# EAGLE board io_breakout-ver2.1 (EAGLE 9.4.2)
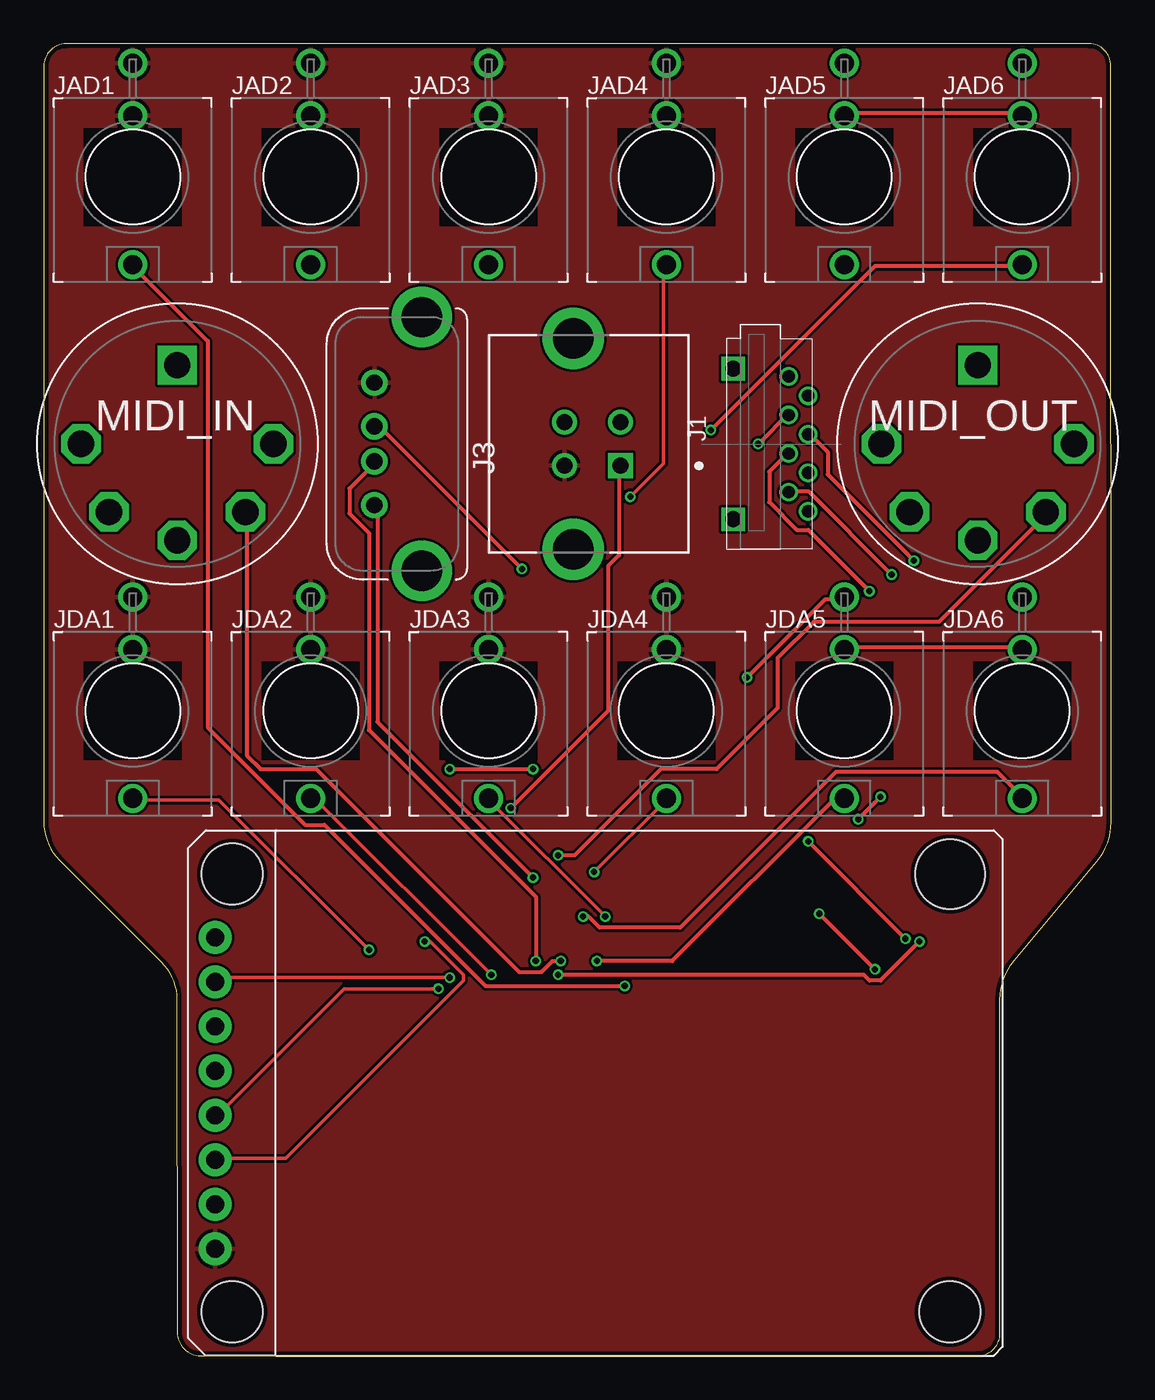
[diagram p0: board, top side]
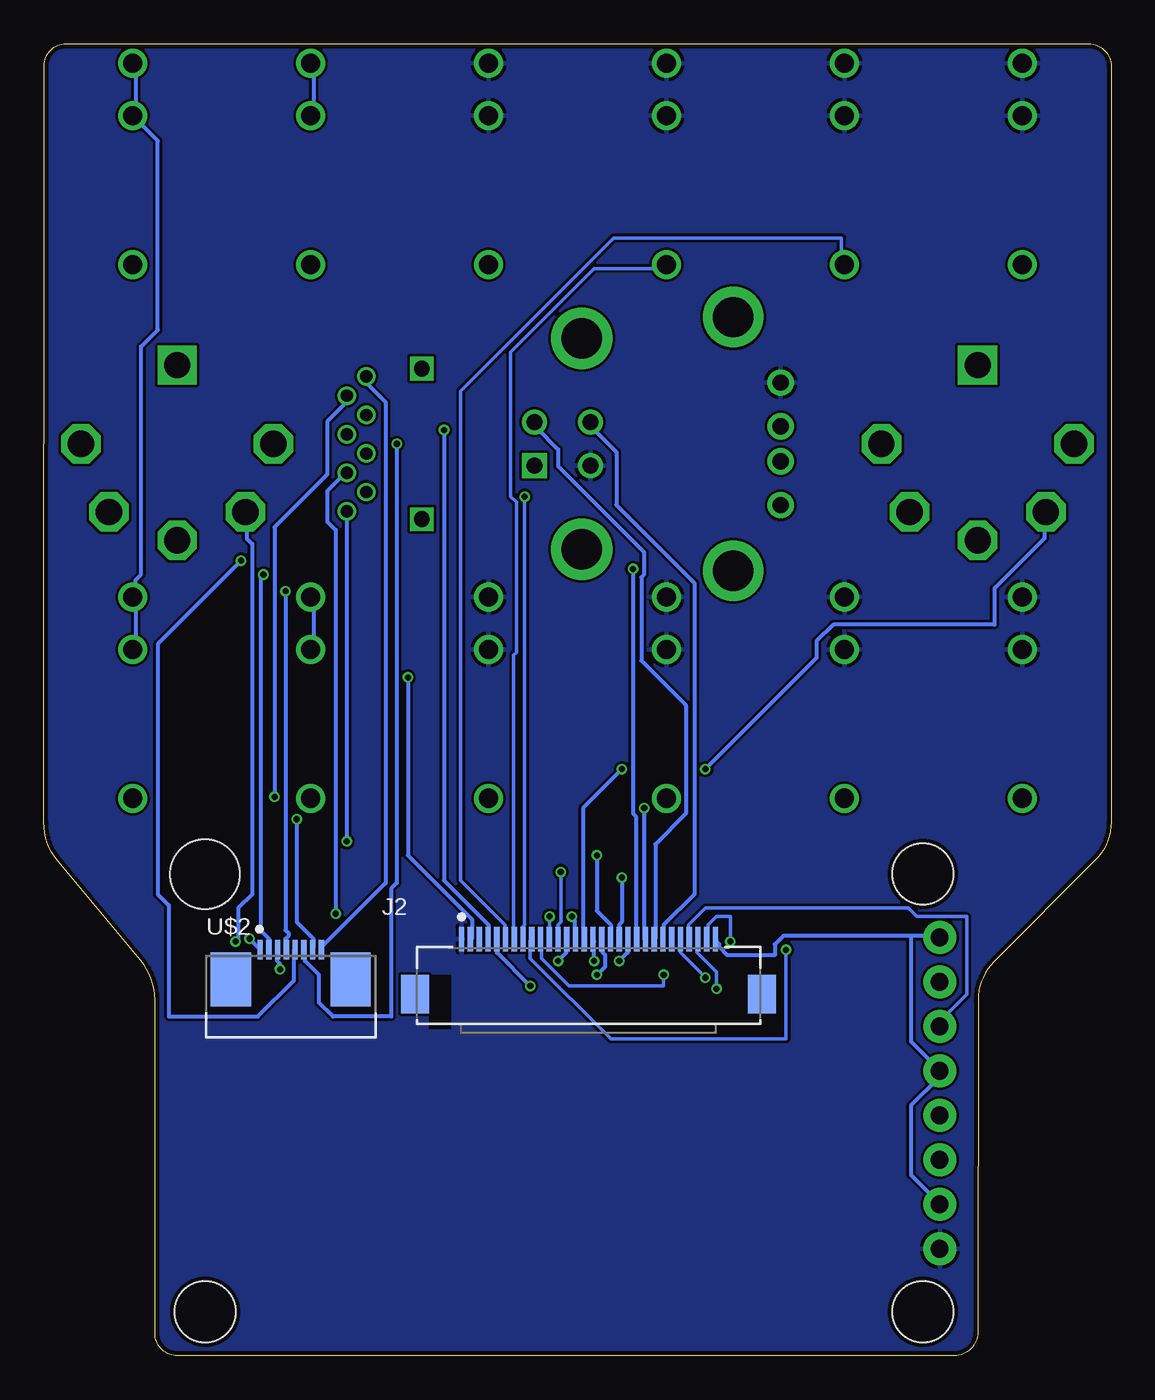
[diagram p1: board, bottom side, seen from below]

Size 60.96 x 74.92 mm. Coordinates in mm from the lower left corner, seen from the top.
Outline: 7.59,20.32 7.62,1.34 arc90 8.96,0 53.34,0 arc90 54.61,1.27 54.61,20.32 arc-40 55.42,22.57 60.15,28.23 arc40 60.96,30.48 60.94,73.67 arc90 59.69,74.92 1.27,74.92 arc90 0,73.65 0,30.48 arc45 0.9,28.31 6.7,22.49 arc-45 7.59,20.32
Copper layers (1*16): Top 0.018mm / dielectric 1.55mm / Bottom 0.018mm
Design rules "eC_2Layer_PClass6_BaseCopperO18_eCDefault": minimum track width 0.15mm, minimum drill 0.35mm, track to track 0.15mm, track to pad 0.15mm, pad to pad 0.15mm, via to via 0.15mm, smd to smd 0mil, copper to edge 0.25mm, drill to drill 0.35mm, minimum pad ring 0.175mm, minimum via ring 0.125mm, stop-mask expansion 0mil, vias tented up to drill 0.45mm, thermal gap 0.2mm
Net classes: 0 POWERxx: width 0.229 mm; 1 defaultxx: width 0.203 mm, drill 0.127 mm, clearance 0.127 mm

## Footprints (pad centres in the part's own frame; a part is rotated, then mirrored left to right if it is on the bottom)
WURTH_ELECTRONICS_61400413321_0 = drill 0.92 pad 1.42 square: 1 1.25,1.82 | drill 0.92 pad 1.42: 2 -1.25,1.82; 3 -1.25,-1.38; 4 1.25,-1.38 | drill 2.3 pad 3.5: 5 -6.02,-0.88; 6 6.02,-0.88
MOLEX_52892-3033_0 = smd 0.3 x 1.4: 1 -7.25,1.575; 2 -6.75,1.575; 3 -6.25,1.575; 4 -5.75,1.575; 5 -5.25,1.575; 6 -4.75,1.575; 7 -4.25,1.575; 8 -3.75,1.575; 9 -3.25,1.575; 10 -2.75,1.575; 11 -2.25,1.575; 12 -1.75,1.575; 13 -1.25,1.575; 14 -0.75,1.575; 15 -0.25,1.575; 16 0.25,1.575; 17 0.75,1.575; 18 1.25,1.575; 19 1.75,1.575; 20 2.25,1.575; 21 2.75,1.575; 22 3.25,1.575; 23 3.75,1.575; 24 4.25,1.575; 25 4.75,1.575; 26 5.25,1.575; 27 5.75,1.575; 28 6.25,1.575; 29 6.75,1.575; 30 7.25,1.575 | smd 1.6 x 2.2: MP1 -9.9,-1.575; MP2 9.9,-1.575
USB-A-S-X-X-VT = drill 0.92 pad 1.5: 1 -3.5,2.71; 2 -1,2.71; 3 1,2.71; 4 3.5,2.71 | drill 2.3 pad 3.4: G1 -7.24,0; G2 7.24,0
ST7735 = drill 1.016 pad 1.88: 1 6.1,-1.54; 2 8.64,-1.54; 3 11.18,-1.54; 4 13.72,-1.54; 5 16.26,-1.54; 6 18.8,-1.54; 7 21.34,-1.54; 8 23.88,-1.54 | hole 3.5: 2.5,-2.5; 27.5,-2.5; 2.5,-43.5 | hole 4: 27.5,-43.5
WQP-PJ301M-12_JACK = drill 1.1: P$1_TIP 0,5; P$2_SWITCH 0,-3.5; P$3_SLEEVE 0,-6.5
OG-MIDI_SD-50BV = drill 1.5 octagon: 1 -5.5,0; 2 0,5.5; 3 5.5,0; 4 -3.89,3.89; 5 3.89,3.89 | drill 1.5 square: P$3 0,-4.5
YAMAICHI_MICROSD_VERTICAL = drill 0.9 square: GND1 -4.3,-3.17; GND2 4.3,-3.17 | drill 0.7: P$1 -3.85,0; P$2 -2.75,1.1; P$3 -1.65,0; P$4 -0.55,1.1; P$5 0.55,0; P$6 1.65,1.1; P$7 2.75,0; P$8 3.85,1.1
TE_1-1734592-8 = smd 0.3 x 1.1: 1 -2.25,2.55; 2 -1.75,2.55; 3 -1.25,2.55; 4 -0.75,2.55; 5 -0.25,2.55; 6 0.25,2.55; 7 0.75,2.55; 8 1.25,2.55 | smd 2.3 x 3.1: 9 -3.92,0.85; 10 2.92,0.85

## Placement (x,y rotation side)
J1  WURTH_ELECTRONICS_61400413321WURTH_ELECTRONICS_61400413321_0_0  [WURTH_ELECTRONICS_61400413321_0]  31.11,52.07 270 top
J2  MOLEX_52892-3033MOLEX_52892-3033_0_0  [MOLEX_52892-3033_0]  29.84,22.23 0 bottom
J3  USB-A-S-X-X-VT  [USB-A-S-X-X-VT]  21.59,52.07 90 top
J4  [ST7735]  8.26,0 90 top
JAD1  THONKICONNNEW  [WQP-PJ301M-12_JACK]  5.08,67.31 180 top
JAD2  THONKICONNNEW  [WQP-PJ301M-12_JACK]  15.24,67.31 180 top
JAD3  THONKICONNNEW  [WQP-PJ301M-12_JACK]  25.4,67.31 180 top
JAD4  THONKICONNNEW  [WQP-PJ301M-12_JACK]  35.56,67.31 180 top
JAD5  THONKICONNNEW  [WQP-PJ301M-12_JACK]  45.72,67.31 180 top
JAD6  THONKICONNNEW  [WQP-PJ301M-12_JACK]  55.88,67.31 180 top
JDA1  THONKICONNNEW  [WQP-PJ301M-12_JACK]  5.08,36.83 180 top
JDA2  THONKICONNNEW  [WQP-PJ301M-12_JACK]  15.24,36.83 180 top
JDA3  THONKICONNNEW  [WQP-PJ301M-12_JACK]  25.4,36.83 180 top
JDA4  THONKICONNNEW  [WQP-PJ301M-12_JACK]  35.56,36.83 180 top
JDA5  THONKICONNNEW  [WQP-PJ301M-12_JACK]  45.72,36.83 180 top
JDA6  THONKICONNNEW  [WQP-PJ301M-12_JACK]  55.88,36.83 180 top
MIDI_IN  OG-MIDI_MAB5SHCUI-SD-50BV  [OG-MIDI_SD-50BV]  7.62,52.07 180 top
MIDI_OUT  OG-MIDI_MAB5SHCUI-SD-50BV  [OG-MIDI_SD-50BV]  53.34,52.07 180 top
U$1  YAMAICHI_SD_CARD  [YAMAICHI_MICROSD_VERTICAL]  42.55,52.07 270 top
U$2  1734592-8  [TE_1-1734592-8]  46.35,20.64 0 bottom

## Library data of the parts
J1 = Wurth Electronics - 61400413321; AUTOMOTIVE: No; CENTROID_NOT_SPECIFIED: No; CONN_ORIENTATION: Vertical; CONTACT_MATERIAL: Gold; CURRENT_RATING: 1.5A; DATASHEET: https://katalog.we-online.com/em/datasheet/61400413321.pdf; DEVICE_CLASS_L1: Connectors; DEVICE_CLASS_L2: USB Connectors; DEVICE_CLASS_L3: unset; DIGIKEY_DESCRIPTION: CONN RCPT USB2.0 TYPEB 4POS VERT; DIGIKEY_PART_NUMBER: 732-2734-ND; FOOTPRINT_VARIANT_NAME_0: Recommended_Land_Pattern; HEIGHT: 16.3mm; IS_FEMALE: yes; LEAD_FREE: Yes; MF: Wurth Electronics; MFG_PACKAGE_IDENT: 61400413321; MFG_PACKAGE_IDENT_DATE: 0; MFG_PACKAGE_IDENT_REV: 0; MOUSER_DESCRIPTION: USB Connectors WR-COM USB Type B 4P CONN Female; MOUSER_PART_NUMBER: 710-61400413321; MPN: 61400413321; NUMBER_OF_CONTACTS: 4; PACKAGE: CONN_PTH_USB_B_VERT; PITCH: 2.5mm; PREFIX: J; ROHS: Yes; SHIELDING: true; TEMPERATURE_RANGE_HIGH: +105°C; TEMPERATURE_RANGE_LOW: -40°C; USB_STANDARD: USB 2.0; VERIFICATION_VERSION: 0.0.0.1; VOLTAGE_RATING: 30V
J2 = Molex - 52892-3033; CIIVA_IDS: 12958047; CIRCUITS_LOADED: 30; COMPONENT_LINK_1_DESCRIPTION: Manufacturer URL; COMPONENT_LINK_1_URL: http://www.molex.com/molex/index.jsp; COMPONENT_LINK_3_DESCRIPTION: Package Specification; COMPONENT_LINK_3_URL: http://www.molex.com/pdm_docs/sd/528923033_sd.pdf; CONTACT_POSITION: Bottom; CURRENT_MAX_PER_CONTACT: 0.5A; DATASHEET: http://www.molex.com/webdocs/datasheets/pdf/en-us/0528923033_FFC_FPC_CONNECTORS.pdf; DURABILITY_MATING_CYCLES_MAX: 20; ENTRY_ANGLE: 90degrees Angle; FOOTPRINT_VARIANT_NAME_0: Manufacturer Recommended; IMPORTED: yes; IMPORTED_FROM: vault; IMPORT_TS: 1521848668; MATED_HEIGHT: 2.00mm; MATERIAL___METAL: Phosphor Bronze; MATERIAL___PLATING_MATING: Silver, Tin-Bismuth; MATERIAL___PLATING_TERMINATION: Silver, Tin-Bismuth; MF: Molex; MOUNTING_TECHNOLOGY: Surface Mount; MPN: 52892-3033; NUMBER_OF_ROWS: 1; ORIENTATION: Right Angle; PACKAGE: 52892-3033; PACKAGE_DESCRIPTION: 30-Lead FPC Connector, Pitch 0.5 mm; PACKAGE_VERSION: Rev. A, 05/2013; PACKING: Tape and Reel; PCB_LOCATOR: No; PCB_RETENTION: Yes; PITCH___MATING_INTERFACE: 0.50mm; PITCH___TERMINATION_INTERFACE: 0.50mm; POLARIZED_TO_PCB: No; PREFIX: J; RELEASE_DATE: 1411387070; ROHS: Yes; STACKABLE: No; VAULT_GUID: 0169C182-1258-4790-B51B-8D965E90A908; VAULT_REVISION: 36DEA303-18DB-4C92-B706-163F4C1D6A90; VOLTAGE_MAX: 50V
J3 = USB-A-S-X-X-VT; AVAILABILITY: Unavailable; DESCRIPTION: Conn USB 2.0 Type A RCP 4 POS 2mm/2.5mm Solder ST Thru-Hole 4 Terminal 1 Port Tray; MF: Samtec; MP: USB-A-S-S-W-VT; PACKAGE: None; PRICE: None
J4 = SparkFun-Connectors-with-tft
JAD1-JAD6 JDA1-JDA6 U$1 = MusicThingModular
MIDI_IN MIDI_OUT = midi-connectors
U$2 = TE - 1-1734592-0

## Nets
AD_V1: J2.5 JAD1.P$1_TIP
AD_V2 [defaultxx]: J2.6 JAD2.P$1_TIP
AD_V3 [defaultxx]: J2.7 JAD3.P$1_TIP
AD_V4 [defaultxx]: J2.8 JAD4.P$1_TIP
DA_V1 [defaultxx]: J2.9 JDA1.P$1_TIP
DA_V2 [defaultxx]: J2.10 JDA2.P$1_TIP
DA_V3 [defaultxx]: J2.11 JDA3.P$1_TIP
DA_V4 [defaultxx]: J2.12 JDA4.P$1_TIP
DA_V5: J2.13 JDA5.P$1_TIP
DA_V6: J2.14 JDA6.P$1_TIP
GND: J1.4 J2.1 J3.4 J4.1 JAD1.P$2_SWITCH JAD1.P$3_SLEEVE JAD2.P$2_SWITCH JAD2.P$3_SLEEVE JAD3.P$2_SWITCH JAD3.P$3_SLEEVE JAD4.P$2_SWITCH JAD4.P$3_SLEEVE JDA1.P$2_SWITCH JDA1.P$3_SLEEVE JDA2.P$2_SWITCH JDA2.P$3_SLEEVE JDA3.P$2_SWITCH JDA3.P$3_SLEEVE JDA4.P$2_SWITCH JDA4.P$3_SLEEVE
MIDI_IN_PIN4: J2.16 MIDI_IN.4
MIDI_IN_PIN5: J2.15 MIDI_IN.5
MIDI_OUT_PIN4: J2.18 MIDI_OUT.4
MIDI_OUT_PIN5: J2.17 MIDI_OUT.5
N$1: U$1.P$8 U$2.1
N$2: U$1.P$7 U$2.2
N$3: U$1.P$6 U$2.3
N$4: U$1.P$5 U$2.4
N$5: U$1.P$3 U$2.6
N$6: U$1.P$4 U$2.5
N$7: U$1.P$2 U$2.7
N$8: U$1.P$1 U$2.8
SPI0_MOSI [defaultxx]: J2.28 J4.4
SPI0_SCK [defaultxx]: J2.29 J4.3
T_ANALOG_LEFT: JAD5.P$1_TIP
T_ANALOG_RIGHT: J2.4 JAD6.P$1_TIP
TAGND: J2.2 JAD5.P$2_SWITCH JAD5.P$3_SLEEVE JAD6.P$2_SWITCH JAD6.P$3_SLEEVE JDA5.P$2_SWITCH JDA5.P$3_SLEEVE JDA6.P$2_SWITCH JDA6.P$3_SLEEVE
TFT_CS [defaultxx]: J2.26 J4.7
TFT_DC [defaultxx]: J2.27 J4.6
USB_A_D+: J2.21 J3.3
USB_A_D-: J2.20 J3.2
USB_A_VCC: J2.19 J3.1
USB_B_D+: J1.3 J2.24
USB_B_D-: J1.2 J2.23
USB_B_VCC: J1.1 J2.22
VIN: J2.30 J4.2 J4.5 J4.8

## Tracks (layer width: path | path; a pad name or v marks a point on that pad's centre or on a via)
AD_V1  (via drill 0.35)
  Top 0.229: v33.18,21.11 25.24,21.11 16.03,30.32 14.92,30.32 9.37,35.88 9.37,57.94 5.08,62.23 JAD1.P$1_TIP
  Bottom 0.229: v33.18,21.11 35.08,23.02 35.08,23.65 J2.5
AD_V2
  Bottom 0.203: J2.6 34.61,23.81 34.61,24.61 37.15,27.15 37.15,55.09 28.42,63.82 15.4,63.82 15.4,62.55 15.24,62.39 JAD2.P$1_TIP
AD_V3
  Bottom 0.203: JAD3.P$1_TIP 25.4,62.07 29.53,62.07 34.29,57.31 34.29,49.05 33.97,48.74 33.97,40.16 34.13,40.01 34.13,23.81 J2.7
AD_V4  (via drill 0.35)
  Top 0.203: v33.5,49.05 35.4,50.96 35.4,62.07 35.56,62.23 JAD4.P$1_TIP
  Bottom 0.203: v33.5,49.05 33.5,24.61 33.66,24.45 33.66,23.81 J2.8
DA_V1  (via drill 0.35)
  Top 0.203: v18.57,23.18 10,31.75 5.08,31.75 JDA1.P$1_TIP
  Bottom 0.203: v18.57,23.18 18.57,18.1 28.57,18.1 33.18,22.7 33.18,23.65 J2.9
DA_V2  (via drill 0.35)
  Top 0.203: v25.56,21.75 15.56,31.75 15.24,31.75 JDA2.P$1_TIP
  Bottom 0.203: v25.56,21.75 25.56,21.11 30.96,21.11 32.54,22.7 32.54,23.65 J2.10
DA_V3  (via drill 0.35)
  Top 0.203: v32.07,25.08 25.4,31.75 JDA3.P$1_TIP
  Bottom 0.203: v32.07,25.08 32.07,23.81 J2.11
DA_V4  (via drill 0.35)
  Top 0.203: v31.43,27.62 35.56,31.75 JDA4.P$1_TIP
  Bottom 0.203: v31.43,27.62 31.43,24.77 31.59,24.61 31.59,23.81 J2.12
DA_V5  (via drill 0.35)
  Top 0.229: v31.59,22.54 35.88,22.54 45.09,31.75 45.72,31.75 JDA5.P$1_TIP
  Bottom 0.229: v31.59,22.54 31.11,23.02 31.11,23.65 J2.13
DA_V6  (via drill 0.35)
  Top 0.229: v30.8,25.08 31.11,25.08 31.75,24.45 36.35,24.45 45.24,33.34 54.45,33.34 55.88,31.91 JDA6.P$1_TIP
  Bottom 0.229: v30.8,25.08 30.64,24.92 30.64,23.81 J2.14
GND
  pour Top: -2.54,75.56 66.67,75.56 66.67,-4.45 -2.54,-4.45
  pour Bottom: -2.54,76.2 -2.54,-5.71 67.94,-5.71 67.94,76.2
MIDI_IN_PIN4  (via drill 0.35)
  Top 0.229: v29.53,22.54 29.05,22.54 28.42,21.91 27.15,21.91 15.56,33.5 12.38,33.5 11.59,34.29 11.59,48.1 MIDI_IN.4
  Bottom 0.229: v29.53,22.54 29.53,23.65 J2.16
MIDI_IN_PIN5  (via drill 0.35)
  Top 0.229: v23.18,33.5 v27.94,33.5
  Bottom 0.229: v27.94,33.5 30.16,31.27 30.16,23.81 J2.15 | v23.18,33.5 16.83,39.85 16.83,40.8 15.88,41.75 6.67,41.75 6.67,43.81 3.81,46.67 3.81,48.1 MIDI_IN.5
MIDI_OUT_PIN4  (via drill 0.35)
  Top 0.229: v29.37,28.57 30.32,28.57 35.24,33.5 38.42,33.5 41.91,36.99 41.91,39.85 43.97,41.91 51.12,41.91 57.31,48.1 MIDI_OUT.4
  Bottom 0.229: v29.37,28.57 29.37,25.4 28.57,24.61 28.57,23.81 J2.18
MIDI_OUT_PIN5  (via drill 0.35)
  Top 0.229: v29.37,21.75 46.83,21.75 47.15,21.43 47.78,21.43 v50.01,23.65
  Bottom 0.229: v29.37,21.75 28.89,22.23 28.89,22.86 29.05,23.02 29.05,23.65 J2.17 | v50.01,23.65 49.85,23.81 49.85,25.56 49.05,26.35 49.05,46.36 49.37,46.67 49.37,48.1 MIDI_OUT.5
N$1  (via drill 0.35)
  Top 0.229: v43.66,29.37 v49.21,23.81
  Bottom 0.229: v49.21,23.81 48.74,23.34 U$2.1 | v43.66,29.37 43.66,48.1 U$1.P$8
N$2  (via drill 0.35)
  Top 0.229: v48.42,44.61 43.66,49.37 42.55,49.37 U$1.P$7
  Bottom 0.229: v48.42,44.61 48.58,44.45 48.58,24.29 48.1,23.81 48.1,23.34 U$2.2
N$3  (via drill 0.35)
  Top 0.229: v44.29,25.24 v47.47,22.07
  Bottom 0.229: v47.47,22.07 47.47,22.38 47.62,22.54 47.62,23.18 U$2.3 | v44.29,25.24 44.29,47.15 44.77,47.62 44.77,49.37 43.66,50.48 U$1.P$6
N$4  (via drill 0.35)
  Top 0.229: v47.15,43.66 43.66,47.15 43.02,47.15 41.43,48.74 41.43,50.48 42.55,51.59 U$1.P$5
  Bottom 0.229: v47.15,43.66 47.15,24.29 46.99,24.13 46.99,23.97 47.15,23.81 47.15,23.34 U$2.4
N$5  (via drill 0.35)
  Top 0.229: v40.8,52.07 42.55,53.82 U$1.P$3
  Bottom 0.229: v40.8,52.07 40.8,26.99 41.12,26.67 41.12,19.37 44.45,19.37 45.24,20.16 45.24,21.75 46.04,22.54 46.04,23.18 U$2.6
N$6  (via drill 0.35)
  Top 0.229: v49.69,45.4 44.77,50.32 44.77,51.59 43.66,52.7 U$1.P$4
  Bottom 0.229: v49.69,45.4 54.45,40.64 54.45,26.35 53.82,25.72 53.82,19.37 48.74,19.37 46.67,21.43 46.67,23.18 U$2.5
N$7  (via drill 0.35)
  Top 0.229: v47.78,31.91 v46.51,30.64
  Bottom 0.229: v46.51,30.64 46.51,24.77 45.56,23.81 45.56,23.34 U$2.7 | v47.78,31.91 47.78,47.31 44.77,50.32 44.77,53.34 43.66,54.45 43.66,54.77 U$1.P$2
N$8
  Bottom 0.229: U$1.P$1 42.55,55.56 41.43,54.45 41.43,26.99 45.09,23.34 U$2.8
SPI0_MOSI  (via drill 0.35)
  Top 0.203: v22.54,20.95 17.14,20.95 9.84,13.65 J4.4
  Bottom 0.203: v22.54,20.95 22.54,21.91 23.65,23.02 23.65,23.65 J2.28
SPI0_SCK  (via drill 0.35)
  Top 0.203: v21.75,23.65 22.07,23.65 23.97,21.75 23.97,21.43 13.81,11.27 9.84,11.27 J4.3
  Bottom 0.203: v21.75,23.65 21.75,25.08 22.54,25.08 23.02,24.61 23.02,23.81 J2.29
T_ANALOG_RIGHT  (via drill 0.35)
  Top 0.229: v38.1,52.86 47.47,62.23 55.88,62.23 JAD6.P$1_TIP
  Bottom 0.229: v38.1,52.86 38.1,27.15 35.56,24.61 35.56,23.81 J2.4
TAGND  (via drill 0.35)
  Top 0.229: JAD5.P$2_SWITCH 45.72,70.96 55.88,70.96 JAD6.P$2_SWITCH | v40.16,38.73 44.61,43.18 45.72,43.18 JDA5.P$3_SLEEVE | JDA6.P$2_SWITCH 55.88,40.48 45.72,40.48 JDA5.P$2_SWITCH
  Bottom 0.229: JAD5.P$2_SWITCH 45.72,70.96 45.56,71.12 45.56,73.5 45.72,73.66 JAD5.P$3_SLEEVE | JAD6.P$3_SLEEVE 55.88,73.66 55.72,73.5 55.72,71.12 55.88,70.96 JAD6.P$2_SWITCH 54.45,69.37 54.45,58.58 55.4,57.63 55.4,44.61 55.72,44.29 55.72,43.18 JDA6.P$3_SLEEVE 55.88,43.18 55.72,43.02 55.72,40.64 55.88,40.48 JDA6.P$2_SWITCH | v40.16,38.73 40.16,28.57 36.51,24.92 36.51,23.81 J2.2 | JDA5.P$2_SWITCH 45.72,40.48 45.56,40.64 45.56,43.02 45.72,43.18 JDA5.P$3_SLEEVE
TFT_CS  (via drill 0.35)
  Top 0.203: v23.18,21.59 10,21.59 9.84,21.43 J4.7
  Bottom 0.203: v23.18,21.59 24.61,23.02 24.61,23.65 J2.26
TFT_DC
  Bottom 0.203: J2.27 24.13,23.81 24.13,24.61 23.18,25.56 11.59,25.56 11.11,25.08 8.26,25.08 8.26,20.64 9.68,19.21 9.68,18.89 J4.6
USB_A_D+  (via drill 0.35)
  Top 0.229: v27.3,44.93 19.21,53.02 18.89,53.02 J3.3
  Bottom 0.229: v27.3,44.93 27.3,30.96 27.15,30.8 27.15,23.81 J2.21
USB_A_D-  (via drill 0.35)
  Top 0.229: v28.1,22.54 28.1,26.19 18.57,35.72 18.57,46.99 17.46,48.1 17.46,49.53 18.89,50.96 J3.2
  Bottom 0.229: v28.1,22.54 27.62,23.02 27.62,23.65 J2.20
USB_A_VCC  (via drill 0.35)
  Top 0.229: v27.94,27.3 19.05,36.2 19.05,48.26 18.89,48.42 J3.1
  Bottom 0.229: v27.94,27.3 27.94,24.77 28.1,24.61 28.1,23.81 J2.19
USB_B_D+
  Bottom 0.229: J2.24 25.56,23.81 25.56,24.61 23.81,26.35 23.81,44.13 28.26,48.58 28.26,51.59 29.69,53.02 29.69,53.18 J1.3
USB_B_D-
  Bottom 0.229: J2.23 26.04,23.81 26.04,29.21 24.29,30.96 24.29,37.15 26.83,39.69 26.83,44.45 26.67,44.61 26.67,45.88 31.59,50.8 31.59,51.75 32.86,53.02 32.86,53.18 J1.2
USB_B_VCC  (via drill 0.35)
  Top 0.229: v26.67,31.27 32.23,36.83 32.23,45.09 32.86,45.72 32.86,50.8 J1.1
  Bottom 0.229: v26.67,31.27 26.67,23.81 J2.22
VIN
  Bottom 0.229: J4.2 9.84,8.73 11.43,10.32 11.43,14.29 9.84,15.88 9.84,16.19 J4.5 9.84,16.35 11.43,17.94 11.43,23.97 | 11.43,23.97 9.84,23.97 J4.8 | 11.43,23.97 18.73,23.97 19.21,23.5 19.21,22.86 21.91,22.86 22.38,23.34 22.38,23.5 22.54,23.65 J2.30